# EAGLE board IOT-D1-Mini-1_v3 (EAGLE 9.7.0)
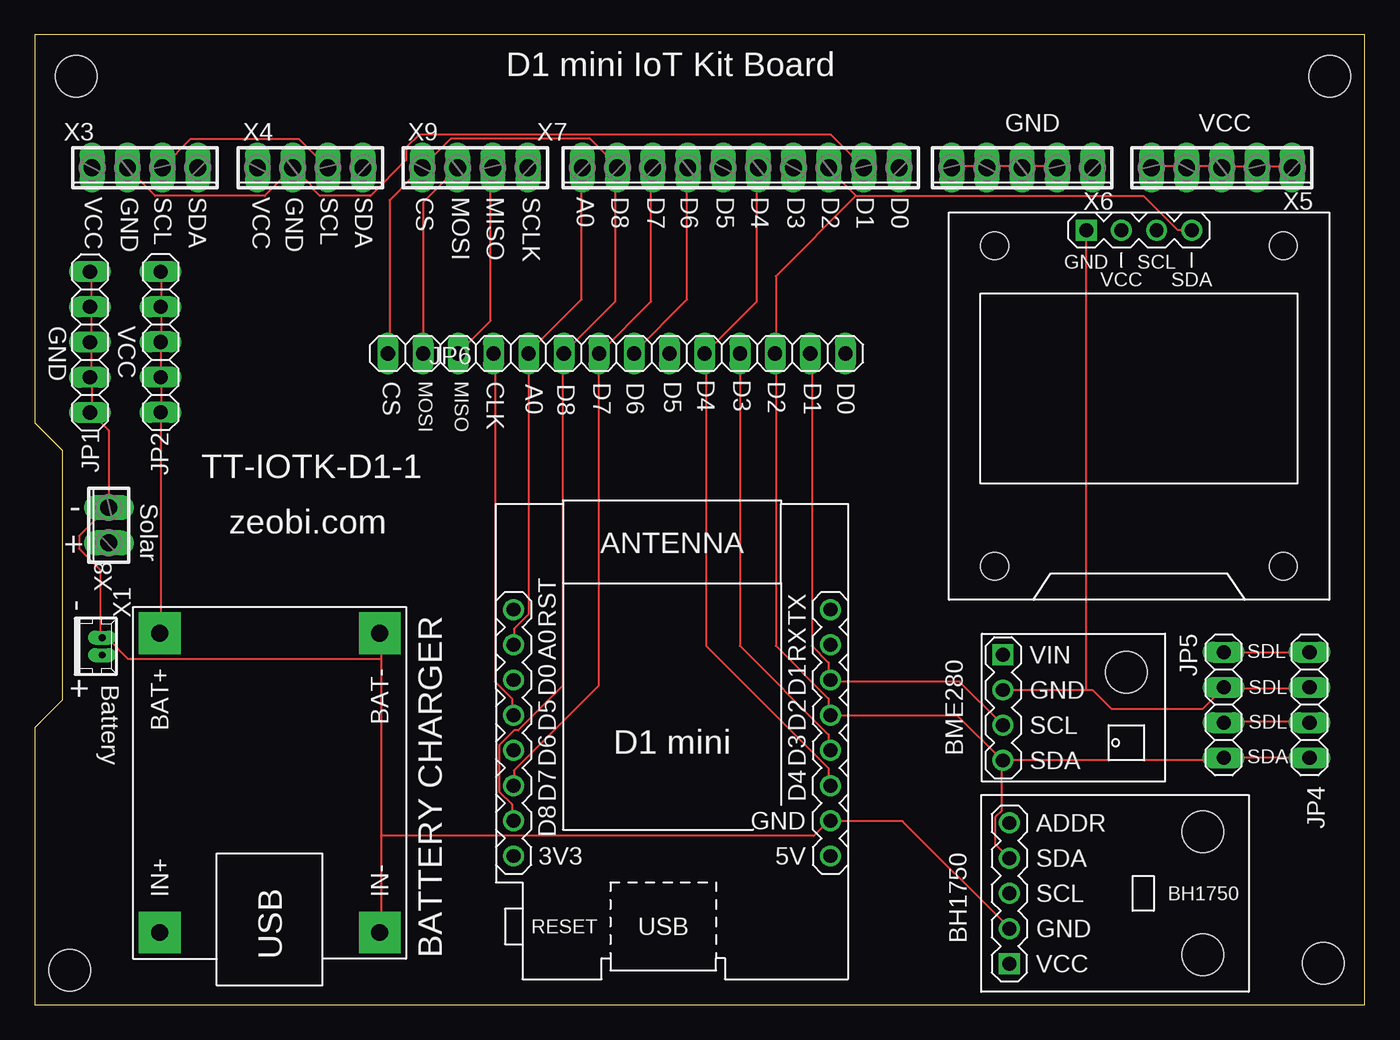
[diagram p0: board, top side]
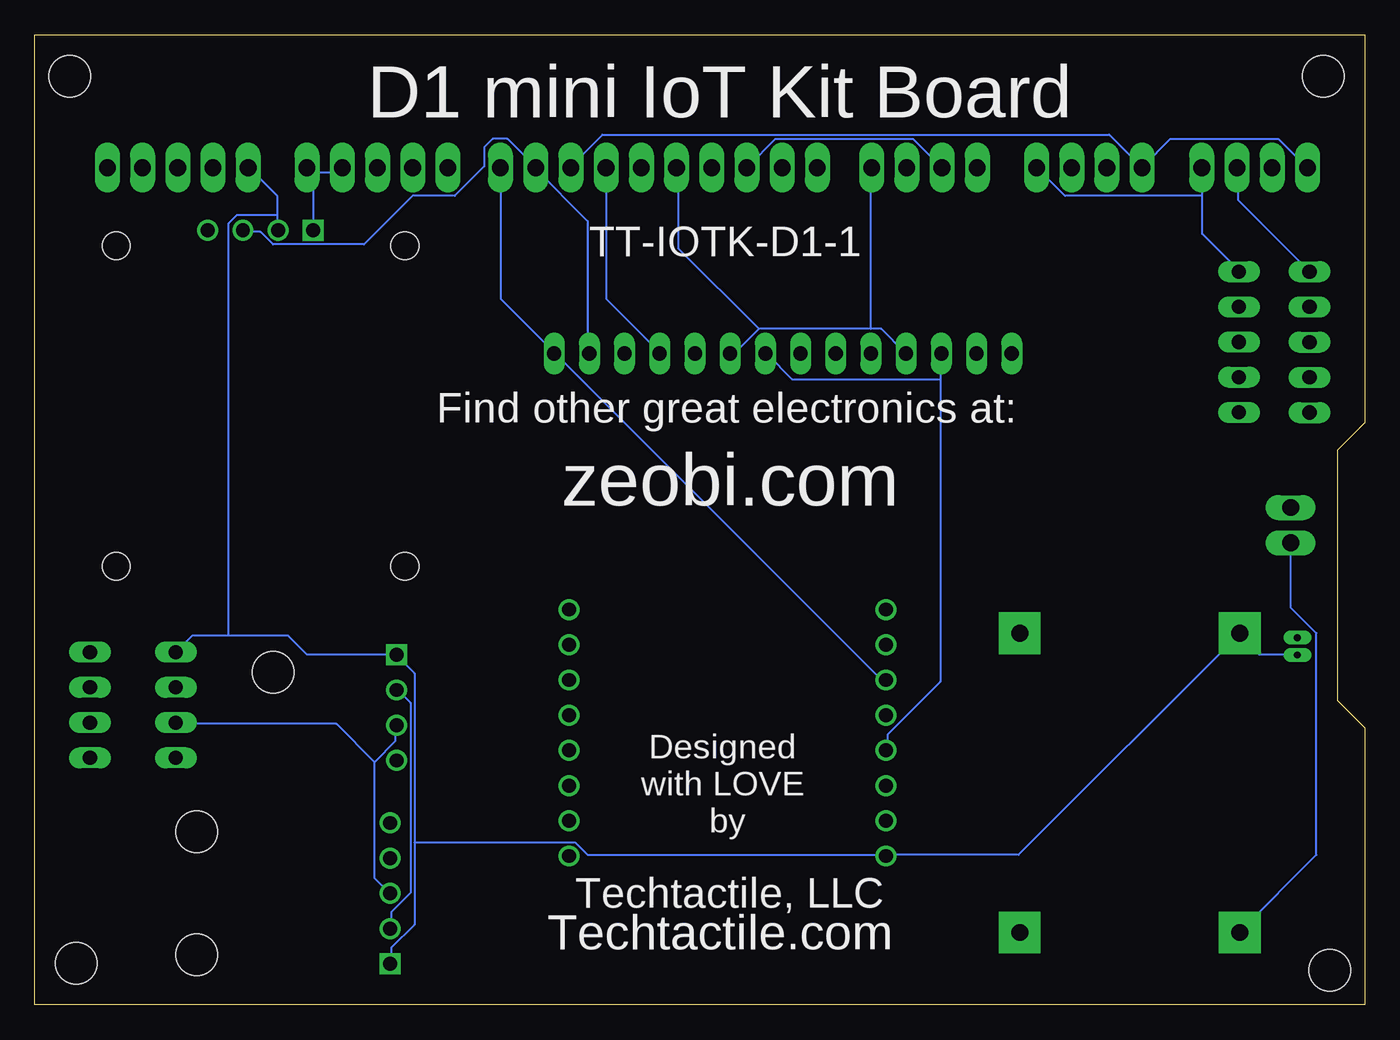
[diagram p1: board, bottom side, seen from below]

Size 96 x 70 mm. Coordinates in mm from the lower left corner, seen from the top.
Outline: 0,0 96,0 96,70 0,70 0,42 2,40 2,22 0,20 0,0
Copper layers (1*16): Top 0.035mm / dielectric 1.5mm / Bottom 0.035mm
Design rules "default": minimum track width 6mil, minimum drill 0.35mm, track to track 6mil, track to pad 6mil, pad to pad 6mil, via to via 6mil, smd to smd 6mil, copper to edge 40mil, drill to drill 6mil, minimum pad ring 10mil, minimum via ring 8mil, stop-mask expansion 4mil, vias tented up to drill 0mil, thermal gap 10mil
Holes 3 mm at 3,67 93.48,67 93,3 2.52,2.52

## Footprints (pad centres in the part's own frame; a part is rotated, then mirrored left to right if it is on the bottom)
TEMP-HUM-PRES-BME280 = drill 1 square: 1 -5.08,3.81 | drill 1: 2 -5.08,1.27; 3 -5.08,-1.27; 4 -5.08,-3.81 | hole 3: 3.81,2.54
1X05 = drill 1.016 long: 1 -5.08,0; 2 -2.54,0; 3 0,0; 4 2.54,0; 5 5.08,0
1X04 = drill 1.016 long: 1 -3.81,0; 2 -1.27,0; 3 1.27,0; 4 3.81,0
1X14 = drill 1.016 long: 1 -16.51,0; 2 -13.97,0; 3 -11.43,0; 4 -8.89,0; 5 -6.35,0; 6 -3.81,0; 7 -1.27,0; 8 1.27,0; 9 3.81,0; 10 6.35,0; 11 8.89,0; 12 11.43,0; 13 13.97,0; 14 16.51,0
WEMOS-D1-MINI = drill 1: JP1.1 -11.43,9.525; JP1.2 -11.43,6.985; JP1.3 -11.43,4.445; JP1.4 -11.43,1.905; JP1.5 -11.43,-0.635; JP1.6 -11.43,-3.175; JP1.7 -11.43,-5.715; JP1.8 -11.43,-8.255; JP2.1 11.43,9.525; JP2.2 11.43,6.985; JP2.3 11.43,4.445; JP2.4 11.43,1.905; JP2.5 11.43,-0.635; JP2.6 11.43,-3.175; JP2.7 11.43,-5.715; JP2.8 11.43,-8.255
LIGHT-SENSOR-BH1750 = drill 1 square: 1 -7.62,-5.08 | drill 1: 2 -7.62,-2.54; 3 -7.62,0; 4 -7.62,2.54; 5 -7.62,5.08 | hole 3: 6.35,4.445; 6.35,-4.445
BATTERY-CHARGER-LI-5V = drill 1.2 pad 3 square: BAT+ 10.795,8.255; BAT- 10.795,-7.62; IN+ -10.795,8.255; IN- -10.795,-7.62
DISPLAY-OLED-128X64-I2C = drill 1 square: 1 -3.81,12.7 | drill 1: 2 -1.27,12.7; 3 1.27,12.7; 4 3.81,12.7 | hole 2: -10.414,11.557; 10.414,11.557; 10.414,-11.557; -10.414,-11.557
53047-02 = drill 0.5 pad 0.698 long: 1 0.625,0.45; 2 -0.625,0.45
4POL254 = drill 1.2 long: 1 -3.81,0; 2 -1.27,0; 3 1.27,0; 4 3.81,0
5POL254 = drill 1.2 long: 1 -5.08,0; 2 -2.54,0; 3 0,0; 4 2.54,0; 5 5.08,0
10POL254 = drill 1.2 long: 1 -11.43,0; 2 -8.89,0; 3 -6.35,0; 4 -3.81,0; 5 -1.27,0; 6 1.27,0; 7 3.81,0; 8 6.35,0; 9 8.89,0; 10 11.43,0
2POL254 = drill 1.2 long: 1 -1.27,0; 2 1.27,0

## Placement (x,y rotation side)
BME280  TEMP-HUM-PRES-BME280  [TEMP-HUM-PRES-BME280]  74.97,21.45 0 top
JP1  GND  [1X05]  3.99,47.82 90 top
JP2  VCC  [1X05]  9.09,47.83 90 top
JP4  I2C  [1X04]  92.01,21.64 270 top
JP5  I2C  [1X04]  85.81,21.64 270 top
JP6  PINHD-1X14  [1X14]  42,47 180 top
U$2  WEMOS-D1-MINI  [WEMOS-D1-MINI]  46,19 0 top
U$4  LIGHT-SENSOR-BH1750  [LIGHT-SENSOR-BH1750]  77.97,8.05 0 top
U$5  BATTERY-CHARGER-LI-5V  [BATTERY-CHARGER-LI-5V]  17.28,16.02 90 top
U$7  DISPLAY-OLED-128X64-I2C  [DISPLAY-OLED-128X64-I2C]  79.7,43.2 0 top
X1  Battery  [53047-02]  4.42,25.87 270 top
X3  [4POL254]  7.96,60.4 180 top
X4  [4POL254]  19.89,60.4 180 top
X5  [5POL254]  85.67,60.4 180 top
X6  [5POL254]  71.26,60.4 180 top
X7  [10POL254]  50.95,60.4 180 top
X8  [2POL254]  5.35,34.61 90 top
X9  [4POL254]  31.79,60.4 180 top

## Library data of the parts
BME280 U$4 U$5 = diy-modules (2)
JP1 JP2 JP4-JP6 = Connector; CATEGORY: CONNECTOR; SUB-CATEGORY: PIN-HEADER
U$2 U$7 = diy-modules
X1 = con-molex; MF: MOLEX; MPN: 53047-0210; OC_FARNELL: 9733051; OC_NEWARK: 57H4701
X3-X9 = con-phoenix-254; OC_FARNELL: unknown; OC_NEWARK: unknown

## Nets
5V: U$2.JP2.8
A0: JP6.10 U$2.JP1.2 X7.10
CS: JP6.9 JP6.14 U$2.JP1.7 X7.9 X9.4
D0: JP6.1 U$2.JP1.3 X7.1
D3: JP6.4 U$2.JP2.5 X7.4
D4: JP6.5 U$2.JP2.6 X7.5
GND: BME280.2 JP1.1 JP1.2 JP1.3 JP1.4 JP1.5 JP4.2 JP5.2 U$2.JP2.7 U$4.2 U$5.BAT- U$5.IN- U$7.1 X1.2 X3.2 X4.2 X6.1 X6.2 X6.3 X6.4 X6.5 X8.2
MISO: JP6.7 JP6.12 U$2.JP1.5 X7.7 X9.2
MOSI: JP6.8 JP6.13 U$2.JP1.6 X7.8 X9.3
N$10: U$4.5
RST: U$2.JP1.1
RX: U$2.JP2.2
SCL: BME280.3 JP4.3 JP5.3 JP6.2 U$2.JP2.3 U$4.3 U$7.3 X3.3 X4.3 X7.2
SCLK: JP6.6 JP6.11 U$2.JP1.4 X7.6 X9.1
SDA: BME280.4 JP4.4 JP5.4 JP6.3 U$2.JP2.4 U$4.4 U$7.4 X3.4 X4.4 X7.3
SOLARIN: U$5.IN+ X8.1
TX: U$2.JP2.1
VCC: BME280.1 JP2.1 JP2.2 JP2.3 JP2.4 JP2.5 JP4.1 JP5.1 U$2.JP1.8 U$4.1 U$5.BAT+ U$7.2 X1.1 X3.1 X4.1 X5.1 X5.2 X5.3 X5.4 X5.5

## Tracks (layer width: path | path; a pad name or v marks a point on that pad's centre or on a via)
A0
  Top 0.152: U$2.JP1.2 34.59,26.06 34.59,27.13 35.66,28.19 35.66,46.94 JP6.10 35.66,47.09 39.47,50.9 39.47,60.35 X7.10
CS
  Top 0.152: JP6.14 25.6,47.09 25.6,58.06 27.89,60.35 X9.4 28.04,60.5 30.02,62.48 40.08,62.48 42.06,60.5 X7.9 41.91,60.35 41.91,50.75 38.25,47.09 JP6.9 38.1,46.94 38.1,23.01 34.9,19.81 34.59,19.81 33.53,18.75 33.53,15.39 34.44,14.48 34.44,13.41 U$2.JP1.7
D0
  Bottom 0.152: U$2.JP1.3 34.59,23.47 34.9,23.47 58.37,46.94 JP6.1 58.52,47.09 62.33,50.9 62.33,60.35 X7.1
D3
  Top 0.152: U$2.JP2.5 57.3,18.44 57.3,19.51 50.9,25.91 50.9,46.94 JP6.4
  Bottom 0.152: X7.4 54.71,60.35 54.71,50.9 50.9,47.09 JP6.4
D4
  Top 0.152: U$2.JP2.6 57.3,15.85 57.3,17.07 48.46,25.91 48.46,46.94 JP6.5 48.46,47.09 52.12,50.75 52.12,60.35 X7.5
GND
  Top 0.152: 24.99,24.99 24.99,26.67 U$5.BAT- | 24.99,24.99 24.99,12.19 | 24.99,12.19 24.99,5.33 U$5.IN- | 5.33,35.97 3.2,33.83 3.2,32.92 4.72,31.39 4.72,26.52 X1.2 4.88,26.36 5.33,26.36 6.71,24.99 24.99,24.99 | JP1.5 4.12,52.88 4.12,50.44 JP1.4 4.12,50.29 4.12,47.85 JP1.3 4.12,47.7 4.12,45.41 JP1.2 4.12,45.26 4.12,42.82 JP1.1 4.12,42.67 5.33,41.45 5.33,35.97 | X4.2 21.03,60.5 19.05,62.48 11.28,62.48 9.3,60.5 X3.2 | 5.33,35.97 X8.2 | U$4.2 70.26,5.64 62.64,13.26 57.45,13.26 U$2.JP2.7 57.3,13.26 56.24,12.19 24.99,12.19 | X6.5 66.29,60.5 68.58,60.5 X6.4 68.73,60.5 71.17,60.5 X6.3 71.32,60.5 73.76,60.5 X6.2 | 75.89,22.71 76.35,22.71 77.72,21.34 84.28,21.34 85.8,22.86 JP5.2 85.95,22.86 91.9,22.86 JP4.2 | 75.89,22.71 69.95,22.71 BME280.2 | 75.89,22.71 75.89,55.78 U$7.1
  Bottom 0.152: X3.2 9.14,60.35 9.14,58.06 4.12,53.03 JP1.5 | 75.89,60.05 75.89,55.93 U$7.1 | 75.89,60.05 76.2,60.35 X6.1 75.89,60.05 | 75.89,60.05 74.22,60.05 73.91,60.35 X6.2 | U$4.2 70.26,5.64 70.26,6.71 68.89,8.08 68.89,21.79 69.8,22.71 BME280.2
MISO
  Top 0.152: X9.2 32.92,60.35 32.92,49.38 30.63,47.09 JP6.12 | X7.7 47.09,60.35 47.09,50.9 43.28,47.09 JP6.7
  Bottom 0.152: 30.63,45.11 30.63,46.94 JP6.12 | 30.63,45.11 30.63,23.32 34.44,19.51 34.44,18.44 U$2.JP1.5 | 30.63,45.11 41.3,45.11 43.13,46.94 JP6.7
MOSI
  Top 0.152: JP6.13 28.04,47.09 28.04,57.91 30.48,60.35 X9.3 | U$2.JP1.6 34.59,15.85 34.59,16.92 40.69,23.01 40.69,46.94 JP6.8 40.84,47.09 44.5,50.75 44.5,60.35 X7.8
  Bottom 0.152: X9.3 30.63,60.5 32.61,62.48 42.52,62.48 44.5,60.5 X7.8
SCL
  Top 0.152: JP5.3 85.95,20.42 91.9,20.42 JP4.3 | BME280.3 69.8,20.27 66.75,23.32 57.45,23.32 U$2.JP2.3 57.3,23.47 57.3,24.69 56.08,25.91 56.08,46.94 JP6.2 | X3.3 6.71,60.35 8.69,58.37 16.61,58.37 18.59,60.35 X4.3 18.75,60.35 19.96,59.13 19.96,58.98 20.57,58.37 24.23,58.37 26.82,60.96 26.82,61.87 27.74,62.79 57.45,62.79 59.74,60.5 X7.2
  Bottom 0.152: 71.48,17.53 69.95,19.05 69.95,20.12 BME280.3 | 71.48,17.53 71.48,9.14 70.41,8.08 U$4.3 | 71.48,17.53 74.22,20.27 85.8,20.27 JP5.3 | U$7.3 80.92,55.78 79.7,55.78 78.79,54.86 72.24,54.86 68.73,58.37 65.68,58.37 63.55,60.5 63.55,61.87 62.94,62.48 61.87,62.48 59.89,60.5 X7.2 59.89,60.35 56.08,56.54 56.08,47.09 JP6.2
SCLK
  Top 0.152: U$2.JP1.4 34.44,21.03 34.44,22.1 33.22,23.32 33.22,46.94 JP6.11
  Bottom 0.152: 43.74,48.77 45.41,47.09 45.72,47.09 JP6.6 | 35.66,48.77 34.9,48.77 33.22,47.09 JP6.11 | 35.66,48.77 43.74,48.77 | 35.66,48.77 35.66,60.35 X9.1 | 43.74,48.77 49.53,54.56 49.53,60.35 X7.6
SDA
  Top 0.152: JP4.4 91.9,17.83 85.95,17.83 JP5.4 85.8,17.68 69.95,17.68 BME280.4 | BME280.4 69.8,17.53 69.8,14.02 69.34,13.56 69.34,11.58 70.26,10.67 U$4.4 | BME280.4 69.8,17.68 66.6,20.88 57.45,20.88 U$2.JP2.4 57.3,21.03 57.3,22.1 53.49,25.91 53.49,46.94 JP6.3 53.49,47.09 53.49,52.58 59.28,58.37 | 59.28,58.37 80.01,58.37 82.45,55.93 83.36,55.93 U$7.4 | 59.28,58.37 57.3,60.35 X7.3
  Bottom 0.152: X3.4 4.27,60.5 6.25,62.48 14.02,62.48 16,60.5 X4.4 16.15,60.5 18.44,62.79 55.02,62.79 57.3,60.5 X7.3
SOLARIN
  Bottom 0.152: X8.1 5.33,33.22 5.33,28.65 3.5,26.82 3.5,10.82 8.99,5.33 U$5.IN+
VCC
  Top 0.152: JP2.5 9.14,52.88 9.14,50.44 JP2.4 9.14,50.29 9.14,47.85 JP2.3 9.14,47.7 9.14,45.41 JP2.2 9.14,45.26 9.14,42.82 JP2.1 9.14,42.67 9.14,26.82 U$5.BAT+ | X5.1 90.68,60.5 88.24,60.5 X5.2 88.09,60.5 85.8,60.5 X5.3 85.65,60.5 83.21,60.5 X5.4 83.06,60.5 80.62,60.5 X5.5 | JP4.1 91.9,25.45 85.95,25.45 JP5.1
  Bottom 0.152: 11.73,58.37 11.73,55.63 9.14,53.03 JP2.5 | 11.73,58.37 11.73,60.35 X3.1 | 11.73,58.37 21.64,58.37 23.62,60.35 X4.1 | X1.1 4.88,25.3 7.62,25.3 8.99,26.67 U$5.BAT+ 9.14,26.67 24.99,10.82 34.44,10.82 U$2.JP1.8 34.59,10.82 56.08,10.82 57,11.73 68.58,11.73 | 78.49,57 78.49,58.37 80.47,60.35 X5.5 | 78.49,57 78.49,55.93 U$7.2 | 81.99,26.67 84.58,26.67 JP5.1 | 81.99,26.67 77.72,26.67 76.35,25.3 69.95,25.3 BME280.1 69.8,25.15 68.58,23.93 68.58,11.73 | 68.58,11.73 68.58,5.79 70.26,4.12 70.26,3.05 U$4.1 | 78.49,57 81.38,57 81.99,56.39 81.99,26.67

## Text on the board
tNames: D1 mini IoT Kit Board | GND | VCC | VCC | GND | SCL | SDA | VCC | GND | SCL | SDA | CS | MOSI | MISO | SCLK | A0 | D8 | D7 | D6 | D5 | D4 | D3 | D2 | D1 | D0 | GND | VCC | CS | MOSI | MISO | CLK | A0 | D8 | D7 | D6 | D5 | D4 | D3 | D2 | D1 | D0 | TT-IOTK-D1-1 | Solar | - | zeobi.com | + | - | SDL | Battery | + | SDL | BME280 | SDL | SDA | BH1750 | BATTERY CHARGER
bNames: D1 mini IoT Kit Board | TT-IOTK-D1-1 | Find other great electronics at: | zeobi.com | Designed / with LOVE / by | Techtactile, LLC | Techtactile.com